# Altium PCB Pannelisation_janvier2018.PcbDoc (part 1 of 3)
Units mil, origin at the board's own origin, x right, y up, seen from the top; angles counter-clockwise.
Board outline 6785 x 5025 mil, 2 copper layers (Top Layer, Bottom Layer); 423 components, 0 nets, 1281 pads, 340 vias.
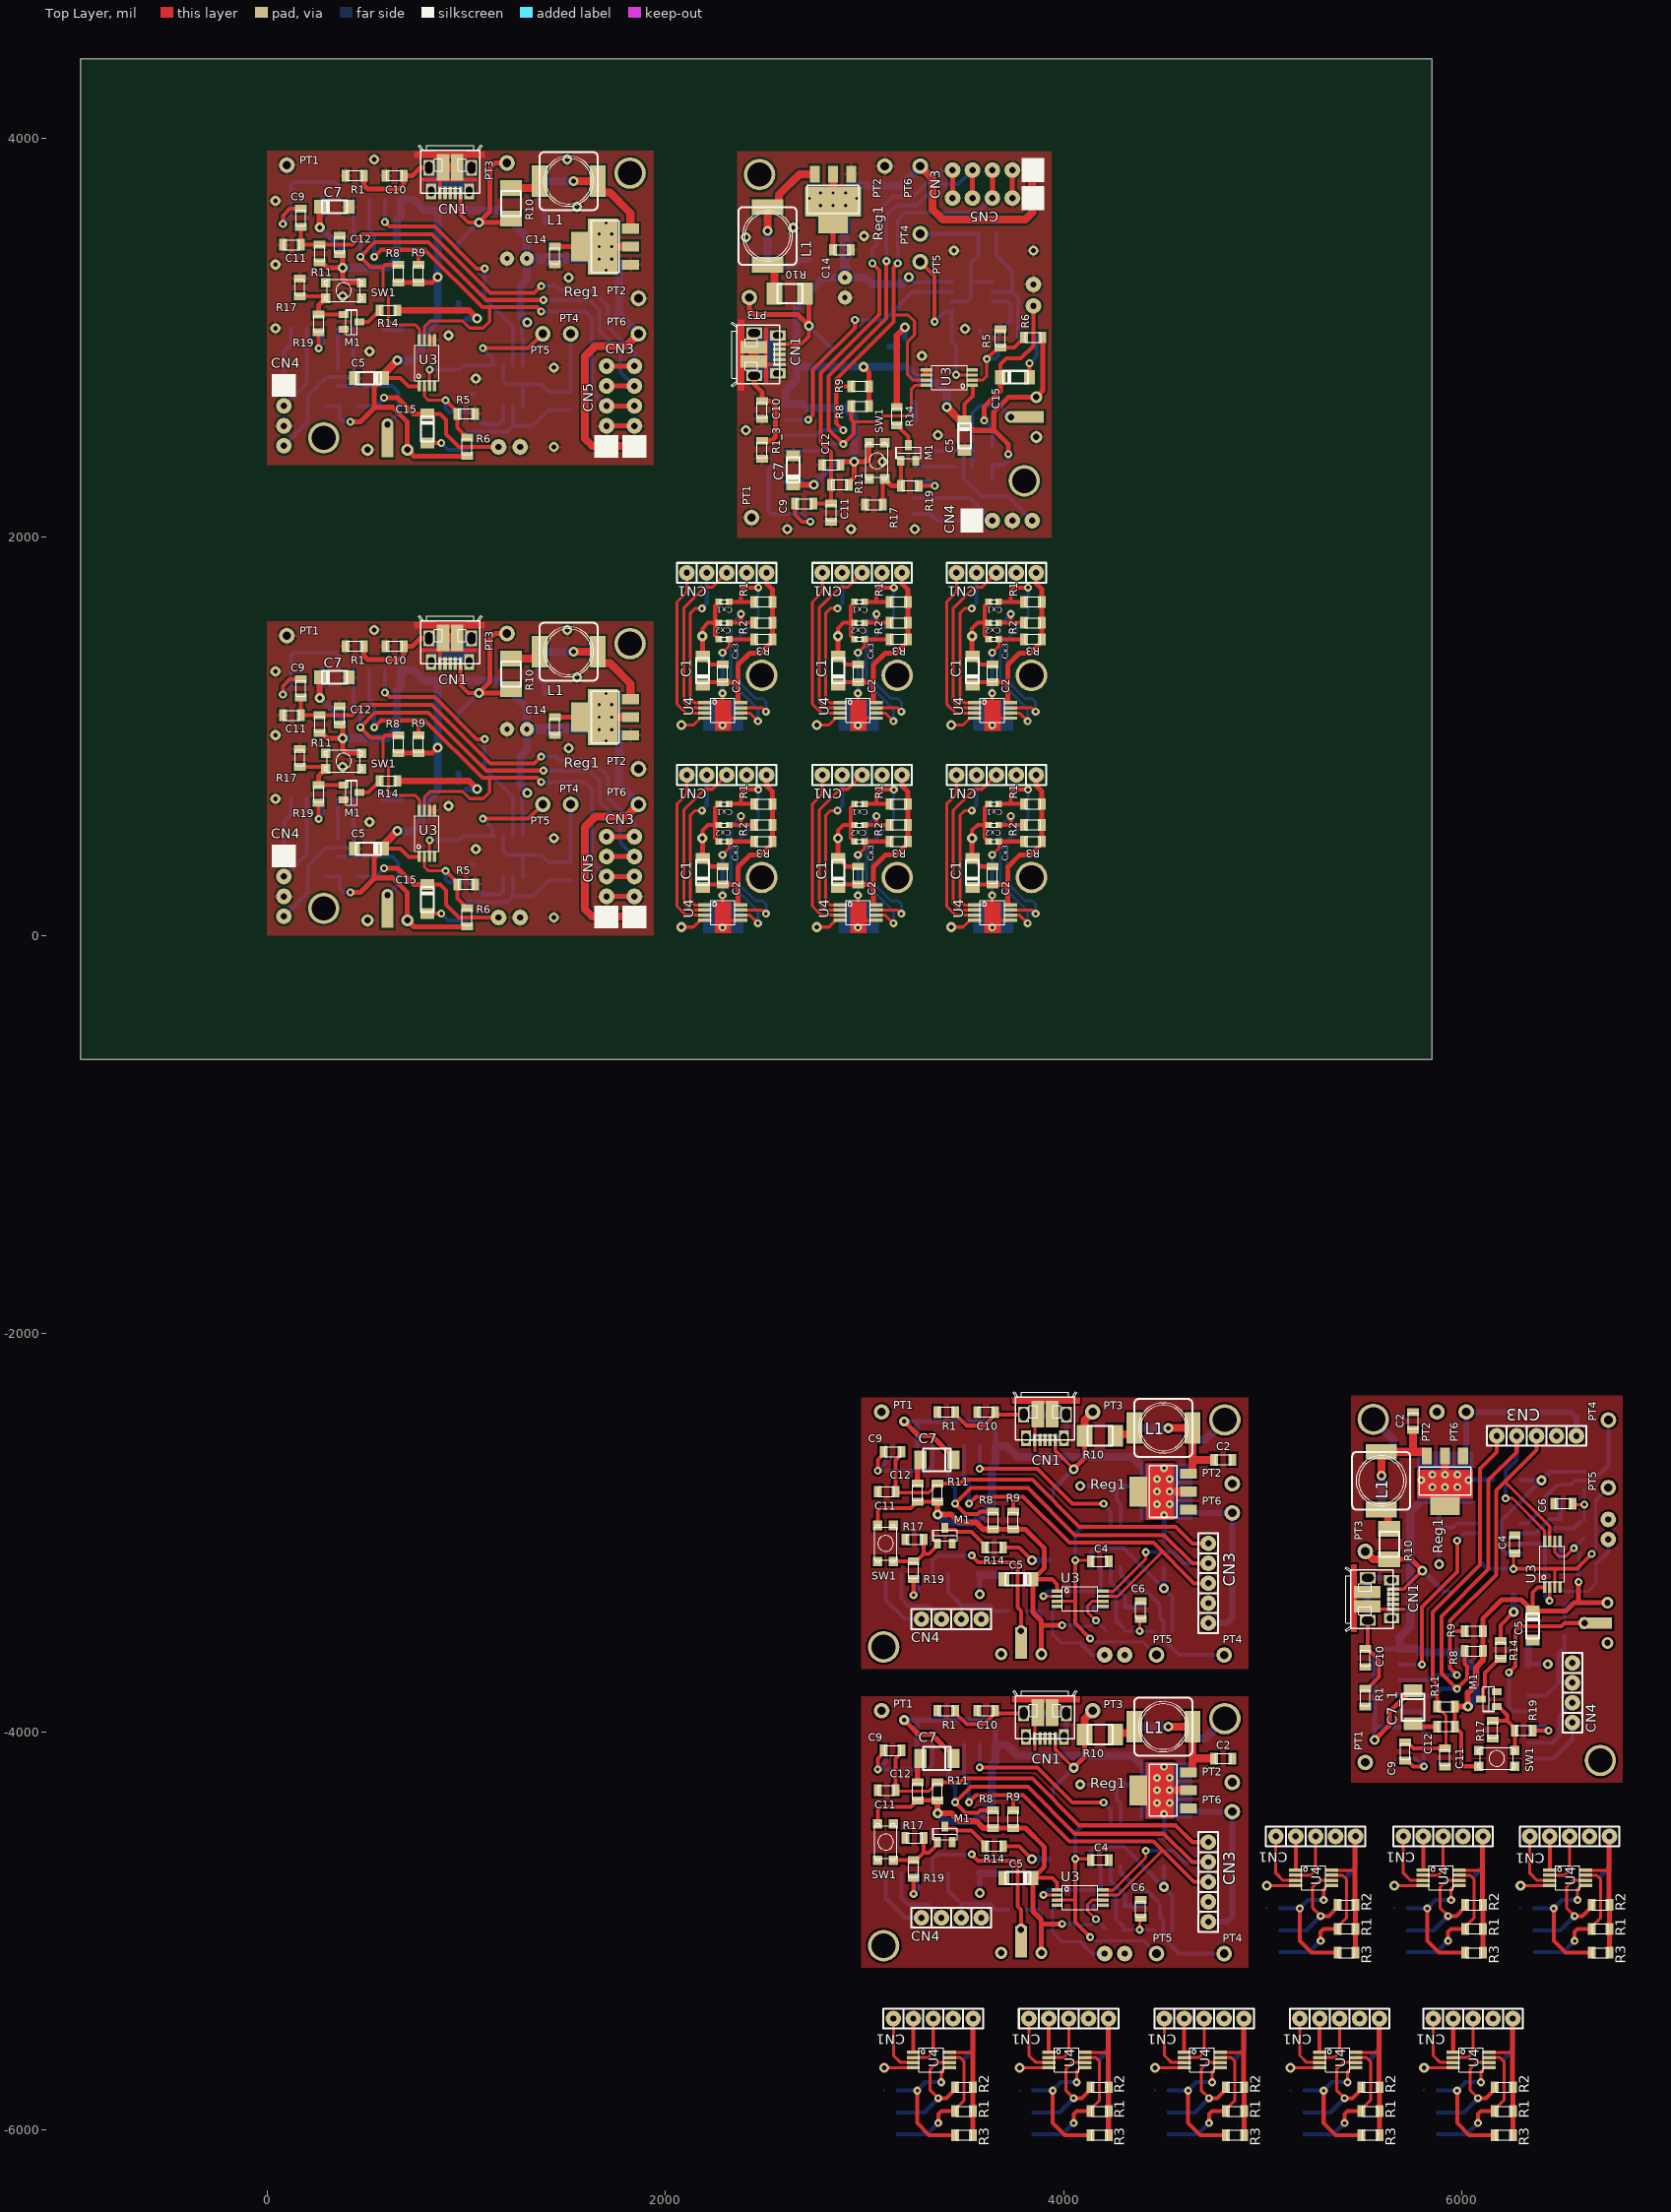
[diagram p0: Top Layer view]
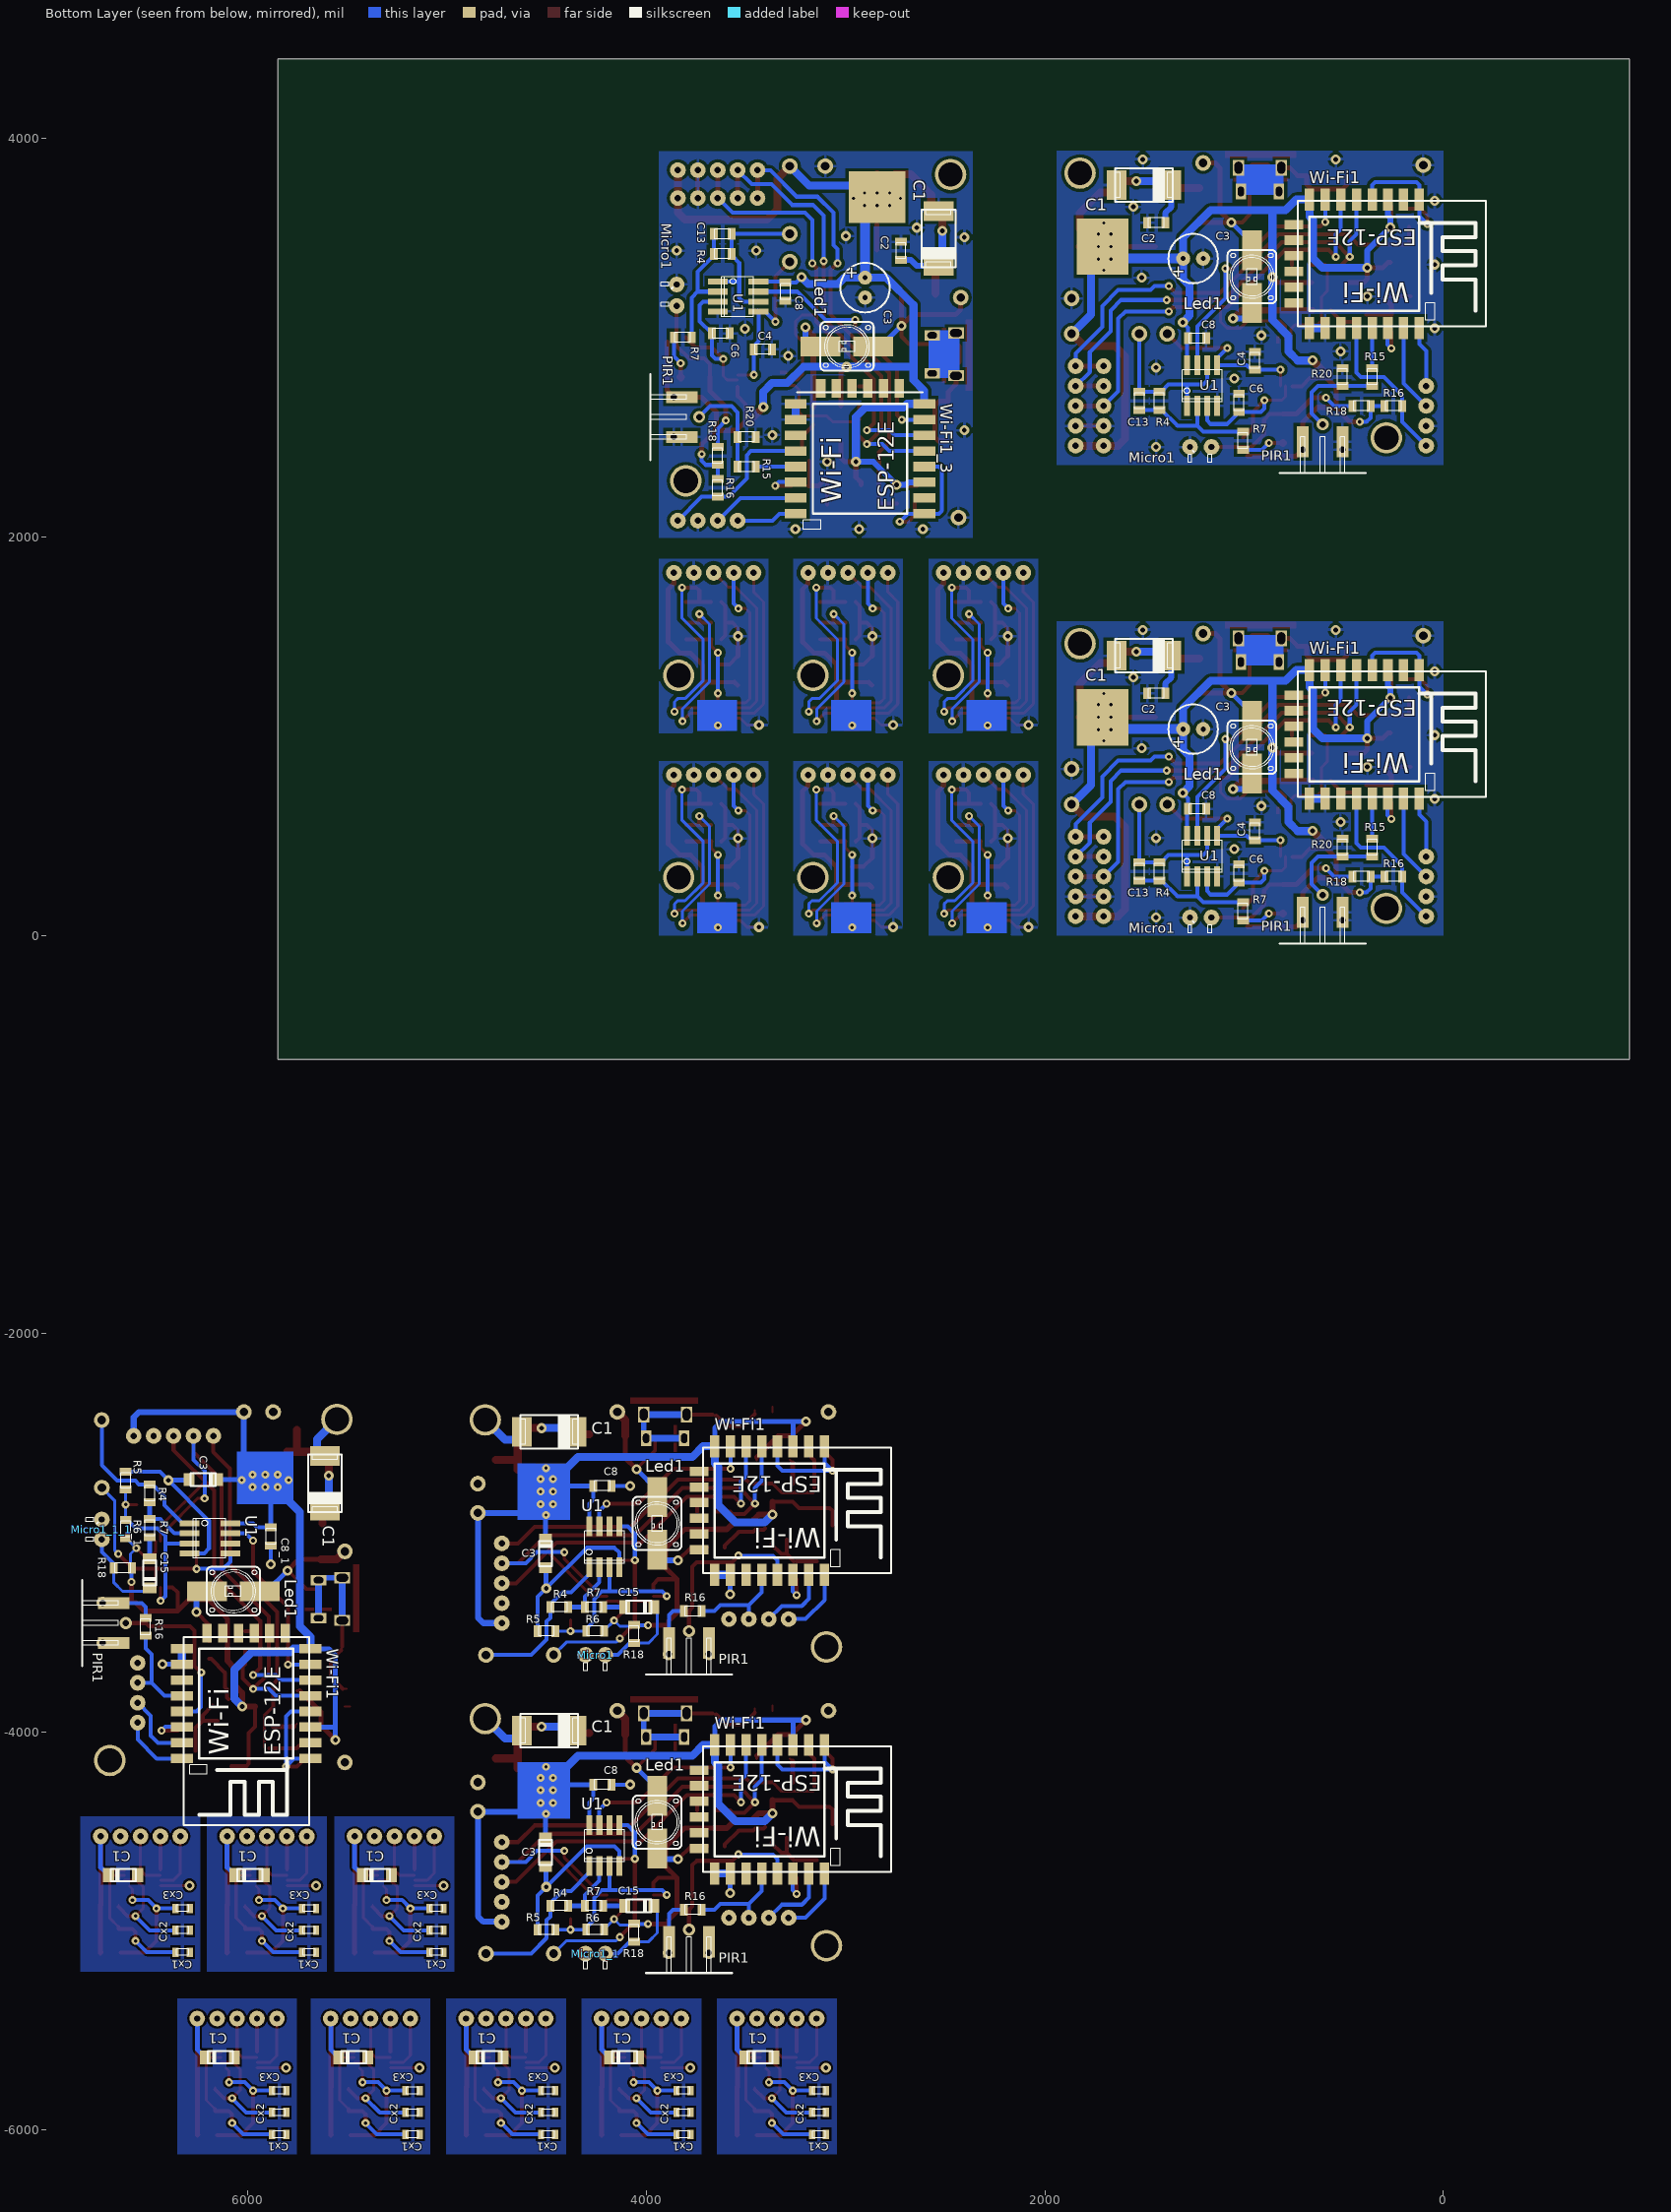
[diagram p1: Bottom Layer view, seen from below]

## Layer stack, top to bottom
Top Layer: signal copper 1.4
Dielectric: dielectric 12.6, FR-4, Dk 4.8
Bottom Layer: signal copper 1.4

## Board outline
-935,-625 5850,-625 5850,4400 -935,4400

## Design rules (kind name [scope] priority, off if disabled: settings)
Clearance [All] p1 off: gap=4
PolygonConnect [All] p1: connectstyle=Relief reliefconductorwidth=10 reliefentries=4 polygonreliefangle="90 Angle"
RoomDefinition Version_2018_01 [InComponentClass('Version_2018_01')] p1: confinementstyle=ConfineIn formatcopy=TRUE lockcomponents=FALSE outline -70,-204 4045,-204 4045,4002 -70,4002
RoomDefinition SON_versept2017 [InComponentClass('SON_versept2017')] p2: confinementstyle=ConfineIn formatcopy=TRUE lockcomponents=FALSE outline 2495,-6510 7395,-6510 7395,-1986 2495,-1986
RoutingVias [All] p1: holewidth=28 width=50 viastyle="Through Hole" minholewidth=28 minwidth=50 maxholewidth=28 maxwidth=50
ShortCircuit [All] p1 off: allowed=FALSE
SilkscreenOverComponentPads [All] p1: minsilkscreentomaskgap=10
SolderMaskExpansion [All] p1: expansion=4
UnRoutedNet [All] p1 off:
Width [All] p1: maxlimit=120 minlimit=10 preferedwidth=10
25 further rules are at their usual default settings.

## Components (designator, comment, footprint, x,y, rotation, side; value= is the part's Value field where it differs from the comment)
C1 "220µF/16V" 7343-31 4606,-2494 r180 bottom
C1 "220µF/16V" 7343-31 4606,-3994 r180 bottom
C1 "220µF/16V" 7343-31 5614,-2634 r270 bottom
C1 "1µF/16V" 3216-18 3505,-5635 r180 bottom
C1 "1µF/16V" 3216-18 4185,-5635 r180 bottom
C1 "1µF/16V" 3216-18 5545,-5635 r180 bottom
C1 "1µF/16V" 3216-18 4865,-5635 r180 bottom
C1 "1µF/16V" 3216-18 6215,-5635 r180 bottom
C1 "1µF/16V" 3216-18 6700,-4720 r180 bottom
C1 "1µF/16V" 3216-18 5425,-4720 r180 bottom
C1 "1µF/16V" 3216-18 6065,-4720 r180 bottom
C1 "220µF/16V" 7343-31 1620,3767 r180 bottom
C1 "220µF/16V" 7343-31 1620,1404 r180 bottom
C1 "220µF/16V" 7343-31 2533,3617 r270 bottom
C1 "1µF/16V" 3216-18 3542,240 r90 top
C1 "1µF/16V" 3216-18 2868,240 r90 top
C1 "1µF/16V" 3216-18 2188,240 r90 top
C1 "1µF/16V" 3216-18 2188,1255 r90 top
C1 "1µF/16V" 3216-18 2868,1255 r90 top
C1 "1µF/16V" 3216-18 3542,1255 r90 top
C2 "100n" 0805 4846,-2634 r180 top
C2 "100n" 0805 4846,-4134 r180 top
C2 "100n" 0805 5754,-2394 r270 top
C2 "100n" 0805 1485,3578 r180 bottom
C2 "100n" 0805 1485,1215 r180 bottom
C2 "100n" 0805 2722,3482 r270 bottom
C2 "47n" 0805 3642,255 r90 top
C2 "47n" 0805 2968,255 r90 top
C2 "47n" 0805 2288,255 r90 top
C2 "47n" 0805 2288,1270 r90 top
C2 "47n" 0805 2968,1270 r90 top
C2 "47n" 0805 3642,1270 r90 top
C3 "10µF/16V" "Tantale 10µF/16V" 4506,-3034 r90 bottom
C3 "10µF/16V" "Tantale 10µF/16V" 4506,-4534 r90 bottom
C3 "10µF/16V" "Tantale 10µF/16V" 6154,-2734 r180 bottom
C3 "47µF/16V" 47µF/16V 1205,3398 r0 bottom
C3 "47µF/16V" 47µF/16V 1205,1035 r0 bottom
C3 "47µF/16V" 47µF/16V 2902,3202 r90 bottom
C4 "100n" 0805 4226,-3144 r180 top
C4 "100n" 0805 4226,-4644 r180 top
C4 "100n" 0805 6264,-3014 r270 top
C4 "100n" 0805 945,2930 r270 bottom
C4 "100n" 0805 945,567 r270 bottom
C4 "100n" 0805 3370,2942 r0 bottom
C5 "10µF/6V3 tantale" "Tantale 10µF/6V3" 3846,-3234 r180 top
C5 "10µF/6V3 tantale" "Tantale 10µF/6V3" 3846,-4734 r180 top
C5 "10µF/6V3 tantale" "Tantale 10µF/6V3" 6354,-3394 r270 top
C5 "10µF/6V3 tantale" "Tantale 10µF/6V3" 585,2798 r180 top
C5 "10µF/6V3 tantale" "Tantale 10µF/6V3" 585,435 r180 top
C5 "10µF/6V3 tantale" "Tantale 10µF/6V3" 3502,2582 r270 top
C6 "10n" 0805 4386,-3434 r90 top
C6 "10n" 0805 4386,-4934 r90 top
C6 "10n" 0805 6554,-2854 r180 top
C6 "100n" 0805 1025,2628 r90 bottom
C6 "100n" 0805 1025,265 r90 bottom
C6 "100n" 0805 3672,3022 r180 bottom
C7 "47µF/10V tantale" "tantale 47µF/10V" 3446,-2634 r180 top
C7 "47µF/10V tantale" "tantale 47µF/10V" 3446,-4134 r180 top
C7 "10µF/6V3 tantale" "Tantale 10µF/6V3" 265,3658 r0 top
C7 "10µF/6V3 tantale" "Tantale 10µF/6V3" 265,1295 r0 top
C7 "10µF/6V3 tantale" "Tantale 10µF/6V3" 2642,2262 r90 top
C7_1 "47µF/10V tantale" "tantale 47µF/10V" 5754,-3794 r270 top (schematic designator C7)
C8 "100n" 0805 4176,-2765 r0 bottom
C8 "100n" 0805 4176,-4265 r0 bottom
C8 "100n" 0805 1190,2998 r0 bottom
C8 "100n" 0805 1190,635 r0 bottom
C8 "100n" 0805 3302,3187 r90 bottom
C8_1 "100n" 0805 5885,-3064 r90 bottom (schematic designator C8)
C9 "100n" 0805 3186,-2594 r180 top
C9 "100n" 0805 3186,-4094 r180 top
C9 "100n" 0805 5714,-4054 r270 top
C9 "100n" 0805 170,3558 r90 top
C9 "100n" 0805 170,1195 r90 top
C9 "100n" 0805 2742,2167 r180 top
C10 "100 n" 0805 3566,-2394 r0 top
C10 "100 n" 0805 3566,-3894 r0 top
C10 "100 n" 0805 5514,-3674 r90 top
C10 "100 n" 0805 596,3815 r0 top
C10 "100 n" 0805 596,1452 r0 top
C10 "100 n" 0805 2485,2593 r90 top
C11 "100n" 0805 3066,-2794 r0 top
C11 "100n" 0805 3066,-4294 r0 top
C11 "100n" 0805 5914,-4174 r90 top
C11 "100n" 0805 80,3467 r0 top
C11 "100n" 0805 80,1104 r0 top
C11 "100n" 0805 2833,2077 r90 top
C12 "100n" 0805 3266,-2754 r270 top
C12 "100n" 0805 3266,-4254 r270 top
C12 "100n" 0805 5874,-3974 r0 top
C12 "100n" 0805 365,3512 r270 top
C12 "100n" 0805 365,1149 r270 top
C12 "100n" 0805 2788,2362 r0 top
C13 "120p" 0805 1525,2638 r90 bottom
C13 "120p" 0805 1525,275 r90 bottom
C13 "120p" 0805 3662,3522 r180 bottom
C14 "220n" 0805 1445,3368 r90 top
C14 "220n" 0805 1445,1005 r90 top
C14 "220n" 0805 2932,3442 r180 top
C15 "1µF/16V" 3216-18 3962.68,-3373.68 r0 bottom
C15 "1µF/16V" 3216-18 3962.68,-4873.68 r0 bottom
C15 "1µF/16V" 3216-18 6493.68,-3277.32 r90 bottom
C15 "1µF/16V" 3216-18 805,2618 r270 top
C15 "1µF/16V" 3216-18 805,255 r270 top
C15 "1µF/16V" 3216-18 3682,2802 r0 top
CN1 "USB Micro B" "USB Micro 714-2347" 3906,-2534 r180 top
CN1 "USB Micro B" "USB Micro 714-2347" 3906,-4034 r180 top
CN1 "USB Micro B" "USB Micro 714-2347" 5654,-3334 r270 top
CN1 "inch_ligne 1x5" INCH_1x5_droit 3545,-5440 r180 top
CN1 "inch_ligne 1x5" INCH_1x5_droit 4225,-5440 r180 top
CN1 "inch_ligne 1x5" INCH_1x5_droit 5585,-5440 r180 top
CN1 "inch_ligne 1x5" INCH_1x5_droit 4905,-5440 r180 top
CN1 "inch_ligne 1x5" INCH_1x5_droit 6255,-5440 r180 top
CN1 "inch_ligne 1x5" INCH_1x5_droit 6740,-4525 r180 top
CN1 "inch_ligne 1x5" INCH_1x5_droit 5465,-4525 r180 top
CN1 "inch_ligne 1x5" INCH_1x5_droit 6105,-4525 r180 top
CN1 "USB Micro B" "USB Micro 714-2347" 920,3727 r180 top
CN1 "USB Micro B" "USB Micro 714-2347" 920,1364 r180 top
CN1 "USB Micro B" "USB Micro 714-2347" 2573,2917 r270 top
CN1 "inch_ligne 1x5" INCH_1x5_droit 3862,805 r180 top
CN1 "inch_ligne 1x5" INCH_1x5_droit 3188,805 r180 top
CN1 "inch_ligne 1x5" INCH_1x5_droit 2508,805 r180 top
CN1 "inch_ligne 1x5" INCH_1x5_droit 2508,1820 r180 top
CN1 "inch_ligne 1x5" INCH_1x5_droit 3188,1820 r180 top
CN1 "inch_ligne 1x5" INCH_1x5_droit 3862,1820 r180 top
CN3 "inch_ligne 1x5" INCH_1x5_droit 4726,-3454 r90 top
CN3 "inch_ligne 1x5" INCH_1x5_droit 4726,-4954 r90 top
CN3 "inch_ligne 1x5" INCH_1x5_droit 6574,-2514 r180 top
CN3 "inch_ligne 1x5" INCH_1x5_ver2_droit 1845,2458 r90 top
CN3 "inch_ligne 1x5" INCH_1x5_ver2_droit 1845,95 r90 top
CN3 "inch_ligne 1x5" INCH_1x5_ver2_droit 3842,3842 r180 top
CN4 "inch_ligne 1x4" INCH_1x4_droit 3286,-3434 r0 top
CN4 "inch_ligne 1x4" INCH_1x4_droit 3286,-4934 r0 top
CN4 "inch_ligne 1x4" INCH_1x4_droit 6554,-3954 r90 top
CN4 "inch_ligne 1x4" INCH_1x4_ver2_droit 85,2758 r270 top
CN4 "inch_ligne 1x4" INCH_1x4_ver2_droit 85,395 r270 top
CN4 "inch_ligne 1x4" INCH_1x4_ver2_droit 3542,2082 r0 top
CN5 "inch_ligne 1x5" INCH_1x5_ver2_droit 1705,2458 r90 top
CN5 "inch_ligne 1x5" INCH_1x5_ver2_droit 1705,95 r90 top
CN5 "inch_ligne 1x5" INCH_1x5_ver2_droit 3842,3702 r180 top
Cx1 "PONT" 0603 3165,-6005 r180 bottom
Cx1 "PONT" 0603 3845,-6005 r180 bottom
Cx1 "PONT" 0603 5205,-6005 r180 bottom
Cx1 "PONT" 0603 4525,-6005 r180 bottom
Cx1 "PONT" 0603 5875,-6005 r180 bottom
Cx1 "PONT" 0603 6360,-5090 r180 bottom
Cx1 "PONT" 0603 5085,-5090 r180 bottom
Cx1 "PONT" 0603 5725,-5090 r180 bottom
Cx1 "PONT" 0402 3674,659 r180 top
Cx1 "PONT" 0402 3000,659 r180 top
Cx1 "PONT" 0402 2320,659 r180 top
Cx1 "PONT" 0402 2320,1674 r180 top
Cx1 "PONT" 0402 3000,1674 r180 top
Cx1 "PONT" 0402 3674,1674 r180 top
Cx2 "PONT" 0603 3165,-5895 r180 bottom
Cx2 "PONT" 0603 3845,-5895 r180 bottom
Cx2 "PONT" 0603 5205,-5895 r180 bottom
Cx2 "PONT" 0603 4525,-5895 r180 bottom
Cx2 "PONT" 0603 5875,-5895 r180 bottom
Cx2 "PONT" 0603 6360,-4980 r180 bottom
Cx2 "PONT" 0603 5085,-4980 r180 bottom
Cx2 "PONT" 0603 5725,-4980 r180 bottom
Cx2 "PONT" 0402 3674,553.73 r180 top
Cx2 "PONT" 0402 3000,553.73 r180 top
Cx2 "PONT" 0402 2320,553.73 r180 top
Cx2 "PONT" 0402 2320,1568.73 r180 top
Cx2 "PONT" 0402 3000,1568.73 r180 top
Cx2 "PONT" 0402 3674,1568.73 r180 top
Cx3 "PONT" 0603 3165,-5785 r180 bottom
Cx3 "PONT" 0603 3845,-5785 r180 bottom
Cx3 "PONT" 0603 5205,-5785 r180 bottom
Cx3 "PONT" 0603 4525,-5785 r180 bottom
Cx3 "PONT" 0603 5875,-5785 r180 bottom
Cx3 "PONT" 0603 6360,-4870 r180 bottom
Cx3 "PONT" 0603 5085,-4870 r180 bottom
Cx3 "PONT" 0603 5725,-4870 r180 bottom
Cx3 "PONT" 0402 3674,471 r180 top
Cx3 "PONT" 0402 3000,471 r180 top
Cx3 "PONT" 0402 2320,471 r180 top
Cx3 "PONT" 0402 2320,1486 r180 top
Cx3 "PONT" 0402 3000,1486 r180 top
Cx3 "PONT" 0402 3674,1486 r180 top
L1 "100µH CD74R series" "SELF CD74R" 4646,-2474 r0 top
L1 "100µH CD74R series" "SELF CD74R" 4646,-3974 r0 top
L1 "100µH CD74R series" "SELF CD74R" 5594,-2594 r90 top
L1 "100µH CD74R series" "SELF CD74R" 1660,3787 r0 top
L1 "100µH CD74R series" "SELF CD74R" 1660,1424 r0 top
L1 "100µH CD74R series" "SELF CD74R" 2513,3657 r90 top
Led1 "LTW5AM" LTW5AM 3946,-2954 r270 bottom
Led1 "LTW5AM" LTW5AM 3946,-4454 r270 bottom
Led1 "LTW5AM" LTW5AM 6074,-3294 r0 bottom
Led1 "LTW5AM" LTW5AM 960,3307 r270 bottom
Led1 "LTW5AM" LTW5AM 960,944 r270 bottom
Led1 "LTW5AM" LTW5AM 2993,2957 r0 bottom
M1 "NTR4501N" "SOT23 (NTR4501)" 3366,-3054 r0 top
M1 "NTR4501N" "SOT23 (NTR4501)" 3366,-4554 r0 top
M1 "NTR4501N" "SOT23 (NTR4501)" 6174,-3874 r90 top
M1 "NTR4501N" "SOT23 (NTR4501)" 385,3118 r270 top
M1 "NTR4501N" "SOT23 (NTR4501)" 385,755 r270 top
M1 "NTR4501N" "SOT23 (NTR4501)" 3182,2382 r0 top
Micro1 "Electret" "Micro_electret simple"#1 4206,-3614 r180 bottom
Micro1 "Electret" "Micro_electret simple"#2 1171,2452 r180 bottom
Micro1 "Electret" "Micro_electret simple"#2 1171,89 r180 bottom
Micro1 "Electret" "Micro_electret simple"#2 3848,3168 r270 bottom
Micro1_1 "Electret" "Micro_electret simple"#1 4206,-5114 r180 bottom (schematic designator Micro1)
Micro1_1_1 "Electret" "Micro_electret simple"#1 6734,-3034 r270 bottom (schematic designator Micro1)
PIR1 "PIR_WL" PIR_WL_footprint 3886,-3554 r180 bottom
PIR1 "PIR_WL" PIR_WL_footprint 3886,-5054 r180 bottom
PIR1 "PIR_WL" PIR_WL_footprint 6674,-3354 r270 bottom
PIR1 "PIR_WL" PIR_WL 705,2478 r180 bottom
PIR1 "PIR_WL" PIR_WL 3822,2702 r270 bottom
PIR1 "PIR_WL" PIR_WL 705,115 r180 bottom
PT1 "GND" "PTEST boucle"#1 3086,-2394 r0 top
PT1 "GND" "PTEST boucle"#1 3086,-3894 r0 top
PT1 "GND" "PTEST boucle"#1 5514,-4154 r90 top
PT1 "GND" "PTEST boucle"#1 100,3867 r0 top
PT1 "GND" "PTEST boucle"#1 100,1504 r0 top
PT1 "GND" "PTEST boucle"#1 2433,2097 r90 top
PT2 "GND" "PTEST boucle"#1 4846,-2754 r0 top
PT2 "GND" "PTEST boucle"#1 4846,-4254 r0 top
PT2 "GND" "PTEST boucle"#1 5874,-2394 r90 top
PT2 "GND" "PTEST boucle"#1 1865,3198 r0 top
PT2 "GND" "PTEST boucle"#1 1865,835 r0 top
PT2 "GND" "PTEST boucle"#1 3102,3862 r90 top
PT3 "+5V" "PTEST boucle"#1 4146,-2394 r0 top
PT3 "+5V" "PTEST boucle"#1 4146,-3894 r0 top
PT3 "+5V" "PTEST boucle"#1 5514,-3094 r90 top
PT3 "+5V" "PTEST boucle"#1 1205,3878 r0 top
PT3 "+5V" "PTEST boucle"#1 1205,1515 r0 top
PT3 "+5V" "PTEST boucle"#1 2422,3202 r90 top
PT4 "Son" "PTEST boucle"#2 4806,-3614 r0 top
PT4 "Son" "PTEST boucle"#2 4806,-5114 r0 top
PT4 "Son" "PTEST boucle"#2 6734,-2434 r90 top
PT4 "Son" "PTEST boucle"#3 1525,3018 r0 top
PT4 "Son" "PTEST boucle"#3 1525,655 r0 top
PT4 "Son" "PTEST boucle"#3 3282,3522 r90 top
PT5 "Seuil" "PTEST boucle"#1 4466,-3614 r0 top
PT5 "Seuil" "PTEST boucle"#1 4466,-5114 r0 top
PT5 "Seuil" "PTEST boucle"#1 6734,-2774 r90 top
PT5 "Seuil" "PTEST boucle"#3 1385,3018 r0 top
PT5 "Seuil" "PTEST boucle"#3 1385,655 r0 top
PT5 "Seuil" "PTEST boucle"#3 3282,3382 r90 top
PT6 "+3V3" "PTEST boucle"#4 4846,-2894 r0 top
PT6 "+3V3" "PTEST boucle"#4 4846,-4394 r0 top
PT6 "+3V3" "PTEST boucle"#4 6014,-2394 r90 top
PT6 "+3V3" "PTEST boucle"#5 1865,3038 r0 top
PT6 "+3V3" "PTEST boucle"#5 1865,675 r0 top
PT6 "+3V3" "PTEST boucle"#5 3262,3862 r90 top
R1 "100K" 0805 3366,-2394 r0 top
R1 "100K" 0805 3366,-3894 r0 top
R1 "100K" 0805 5514,-3874 r90 top
R1 "10K" 0805 3455,-5905 r0 top
R1 "10K" 0805 4135,-5905 r0 top
R1 "10K" 0805 5495,-5905 r0 top
R1 "10K" 0805 4815,-5905 r0 top
R1 "10K" 0805 6165,-5905 r0 top
R1 "10K" 0805 6650,-4990 r0 top
R1 "10K" 0805 5375,-4990 r0 top
R1 "10K" 0805 6015,-4990 r0 top
R1 "100K" 0805 396,3815 r0 top
R1 "100K" 0805 396,1452 r0 top
R1 "10K" 0805 3801,659 r0 top
R1 "10K" 0805 3127,659 r0 top
R1 "10K" 0805 2447,659 r0 top
R1 "10K" 0805 2447,1674 r0 top
R1 "10K" 0805 3127,1674 r0 top
R1 "10K" 0805 3801,1674 r0 top
R1_3 "100K" 0805 2485,2393 r90 top (schematic designator R1)
R2 "10K" 0805 3455,-5785 r0 top
R2 "10K" 0805 4135,-5785 r0 top
R2 "10K" 0805 5495,-5785 r0 top
R2 "10K" 0805 4815,-5785 r0 top
R2 "10K" 0805 6165,-5785 r0 top
R2 "10K" 0805 6650,-4870 r0 top
R2 "10K" 0805 5375,-4870 r0 top
R2 "10K" 0805 6015,-4870 r0 top
R2 "10K" 0805 3801,554 r0 top
R2 "10K" 0805 3127,554 r0 top
R2 "10K" 0805 2447,554 r0 top
R2 "10K" 0805 2447,1569 r0 top
R2 "10K" 0805 3127,1569 r0 top
R2 "10K" 0805 3801,1569 r0 top
R3 "10K" 0805 3455,-6025 r0 top
R3 "10K" 0805 4135,-6025 r0 top
R3 "10K" 0805 5495,-6025 r0 top
R3 "10K" 0805 4815,-6025 r0 top
R3 "10K" 0805 6165,-6025 r0 top
R3 "10K" 0805 6650,-5110 r0 top
R3 "10K" 0805 5375,-5110 r0 top
R3 "10K" 0805 6015,-5110 r0 top
R3 "10K" 0805 3801,471 r0 top
R3 "10K" 0805 3127,471 r0 top
R3 "10K" 0805 2447,471 r0 top
R3 "10K" 0805 2447,1486 r0 top
R3 "10K" 0805 3127,1486 r0 top
R3 "10K" 0805 3801,1486 r0 top
R4 "100K" 0805 4392.68,-3373.68 r0 bottom
R4 "100K" 0805 4392.68,-4873.68 r0 bottom
R4 "100K" 0805 6493.68,-2847.32 r90 bottom
R4 "100K" 0805 1425,2638 r90 bottom
R4 "100K" 0805 1425,275 r90 bottom
R4 "100K" 0805 3662,3422 r180 bottom
R5 "10K" 0805 4546,-3494 r180 bottom
R5 "10K" 0805 4546,-4994 r180 bottom
R5 "10K" 0805 6614,-2694 r270 bottom
R5 "10K" 0805 1045,2618 r180 top
R5 "10K" 0805 1045,255 r180 top
R5 "10K" 0805 3682,3042 r270 top
R6 "10K" 0805 4302.68,-3493.68 r180 bottom
R6 "10K" 0805 4302.68,-4993.68 r180 bottom
R6 "10K" 0805 1005,2498 r270 top
R6 "10K" 0805 1005,135 r270 top
R6 "10K" 0805 3802,3002 r0 top
R6_1 "10K" 0805 6613.68,-2937.32 r270 bottom (schematic designator R6)
R7 "1K" 0805 4217.68,-3373.68 r0 bottom
R7 "1K" 0805 4217.68,-4873.68 r0 bottom
R7 "1K" 0805 6493.68,-3022.32 r90 bottom
R7 "1K" 0805 1005,2438 r90 bottom
R7 "1K" 0805 1005,75 r90 bottom
R7 "1K" 0805 3862,3002 r180 bottom
R8 "10K" 0805 3646,-2894 r270 top
R8 "10K" 0805 3646,-4394 r270 top
R8 "10K" 0805 6014,-3594 r0 top
R8 "10K" 0805 660,3367 r270 top
R8 "10K" 0805 660,1004 r270 top
R8 "10K" 0805 2933,2657 r0 top
R9 "10K" 0805 3746,-2894 r270 top
R9 "10K" 0805 3746,-4394 r270 top
R9 "10K" 0805 6014,-3494 r0 top
R9 "10K" 0805 760,3367 r270 top
R9 "10K" 0805 760,1004 r270 top
R9 "10K" 0805 2933,2757 r0 top
R10 "0R33" 1210 4106,-2514 r0 top
R10 "0R33" 1210 4106,-4014 r0 top
R10 "0R33" 1210 5634,-3134 r90 top
R10 "0R33" 1210 1225,3598 r90 top
R10 "0R33" 1210 1225,1235 r90 top
R10 "0R33" 1210 2702,3222 r180 top
R11 "4K7" 0805 3366,-2754 r270 top
R11 "4K7" 0805 3366,-4254 r270 top
R11 "4K7" 0805 5874,-3874 r0 top
R11 "4K7" 0805 265,3468 r270 top
R11 "4K7" 0805 265,1105 r270 top
R11 "4K7" 0805 2832,2262 r0 top
R14 "68" 0805 3606,-3074 r0 top
R14 "68" 0805 3606,-4574 r0 top
R14 "68" 0805 6194,-3634 r90 top
R14 "68" 0805 565,3138 r0 top
R14 "68" 0805 565,775 r0 top
R14 "68" 0805 3162,2562 r90 top
R15 "330" 0805 356,2848 r270 bottom
R15 "330" 0805 356,485 r270 bottom
R15 "330" 0805 3452,2353 r0 bottom
R16 "10K" 0805 3722.68,-3393.68 r0 bottom
R16 "10K" 0805 3722.68,-4893.68 r0 bottom
R16 "10K" 0805 6513.68,-3517.32 r90 bottom
R16 "10K" 0805 205,2658 r0 bottom
R16 "10K" 0805 205,295 r0 bottom
R16 "10K" 0805 3642,2202 r90 bottom
R17 "15K" 0805 3206,-3034 r0 top
R17 "15K" 0805 3206,-4534 r0 top
R17 "15K" 0805 6154,-4034 r90 top
R17 "15K" 0805 165,3298 r270 top
R17 "15K" 0805 165,935 r270 top
R17 "15K" 0805 3002,2162 r0 top
R18 "2K" 0805 4062.68,-3553.68 r90 bottom
R18 "2K" 0805 4062.68,-5053.68 r90 bottom
R18 "2K" 0805 6673.68,-3177.32 r180 bottom
R18 "2K" 0805 455,2658 r180 bottom
R18 "2K" 0805 455,295 r180 bottom
R18 "2K" 0805 3642,2452 r270 bottom
R19 "470" 0805 3246,-3234 r90 top
R19 "470" 0805 3246,-4734 r90 top
R19 "470" 0805 6354,-3994 r180 top
R19 "470" 0805 260,3027 r90 top
R19 "470" 0805 260,664 r90 top
R19 "470" 0805 3273,2257 r180 top
R20 "15K" 0805 505,2848 r270 bottom
R20 "15K" 0805 505,485 r270 bottom
R20 "15K" 0805 3452,2502 r0 bottom
Reg1 "LM1117/33" "SOT-223 thermo1"#1 4626,-2794 r90 top
Reg1 "LM1117/33" "SOT-223 thermo1"#1 4626,-4294 r90 top
Reg1 "LM1117/33" "SOT-223 thermo1"#1 5914,-2614 r180 top
Reg1 "LM1117/33" "SOT-223 thermo1"#2 1825,3458 r90 top
Reg1 "LM1117/33" "SOT-223 thermo1"#2 1825,1095 r90 top
Reg1 "LM1117/33" "SOT-223 thermo1"#2 2842,3822 r180 top
SW1 "KMR 4" "µSwitch KMR4" 3106,-3054 r90 top
SW1 "KMR 4" "µSwitch KMR4" 3106,-4554 r90 top
SW1 "KMR 4" "µSwitch KMR4" 6174,-4134 r180 top
SW1 "KMR 4" "µSwitch KMR4" 385,3238 r0 top
SW1 "KMR 4" "µSwitch KMR4" 385,875 r0 top
SW1 "KMR 4" "µSwitch KMR4" 3062,2382 r90 top
U1 "AD8052" SOIC08 4286,-3174 r90 bottom
U1 "AD8052" SOIC08 4286,-4674 r90 bottom
U1 "AD8052" SOIC08 6294,-2954 r180 bottom
U1 "AD8052" SOIC08 1285,2658 r90 bottom
U1 "AD8052" SOIC08 1285,295 r90 bottom
U1 "AD8052" SOIC08 3642,3282 r180 bottom
U3 "MCP47FEB21" TSSOP_8 3966,-3294 r0 top
U3 "MCP47FEB21" TSSOP_8 3966,-4794 r0 top
U3 "MCP47FEB21" TSSOP_8 6414,-3274 r90 top
U3 "MCP47FEB21" TSSOP_8 765,2758 r90 top
U3 "MCP47FEB21" TSSOP_8 765,395 r90 top
U3 "MCP47FEB21" TSSOP_8 3542,2762 r180 top
U4 "MCP9808" MSOP-08 3245,-5610 r0 top
U4 "MCP9808" MSOP-08 3925,-5610 r0 top
U4 "MCP9808" MSOP-08 5285,-5610 r0 top
U4 "MCP9808" MSOP-08 4605,-5610 r0 top
U4 "MCP9808" MSOP-08 5955,-5610 r0 top
U4 "MCP9808" MSOP-08 6440,-4695 r0 top
U4 "MCP9808" MSOP-08 5165,-4695 r0 top
U4 "MCP9808" MSOP-08 5805,-4695 r0 top
U4 "MCP9808" MSOP-08 3552,152 r0 top
U4 "MCP9808" MSOP-08 2878,152 r0 top
U4 "MCP9808" MSOP-08 2198,152 r0 top
U4 "MCP9808" MSOP-08 2198,1167 r0 top
U4 "MCP9808" MSOP-08 2878,1167 r0 top
U4 "MCP9808" MSOP-08 3552,1167 r0 top
Wi-Fi1 "ESP-12E" ESP-12E 3106,-2574 r270 bottom
Wi-Fi1 "ESP-12E" ESP-12E 3106,-4074 r270 bottom
Wi-Fi1 "ESP-12E" ESP-12E 5694,-4134 r0 bottom
Wi-Fi1 "ESP-12E" ESP-12E 120,3687 r270 bottom
Wi-Fi1 "ESP-12E" ESP-12E 120,1324 r270 bottom
Wi-Fi1_3 "ESP-12E" ESP-12E 2613,2117 r0 bottom (schematic designator Wi-Fi1)

## Footprints (in the part's own frame and the unit in brackets; to place one, negate y for a bottom-side part, rotate by r counter-clockwise, add the part's x,y. Pads: shape width x height; smd on the part's side, far side on the other; paste and mask are expansions set on the pad)
47µF/16V [mm]
  round 1.8 hole 0.65: 1(2.54,0) 2(0,0)
  silkscreen extent -1.88,-3.15 4.42,3.15
0402 [mm]
  rect 0.838x0.8 smd: 1(0,0) 2(1.3,0)
  silkscreen extent 0.15,-0.25 1.15,0.25
0603 [mm] "résistance CMS"
  rect 0.8x1.2 smd: 1(-0.1,-0.425) 2(1.7,-0.425)
  silkscreen extent 0,-0.85 1.6,0
0805 [mm] "résistance CMS"
  rect 1x1.5 smd: 1(0,0) 2(2.286,0)
  silkscreen extent 0.13,-0.63 2.13,0.63
1210 [mm] "résistance CMS 0,5W ERJ14B"
  rect 2x2.8 smd: 1(0,0) 2(3.9,0)
  silkscreen extent 0.33,-1.26 3.53,1.24
3216-18 [mm] "condensateur tantale CMS (3,2 x 1,6 x 1,6)"
  rect 1.4x1.8 smd: 1(0,0) 2(3.7,0)
  silkscreen extent 0.3,-0.79 3.5,0.81
7343-31 [mm] "condensateur tantale CMS (7,3 x 4,3 x 3,0)"
  rect 2.5x3.8 smd: 1(6.5,0) 2(-0.5,0)
  silkscreen extent -0.65,-2.15 6.65,2.15
ESP-12E [mm] "module Wi-Fi"
  rect 2.8x1.2 smd: 1(-0.2,0) 2(-0.2,-2) 3(-0.2,-4) 4(-0.2,-6) 5(-0.2,-8) 6(-0.2,-10) 7(-0.2,-12) 8(-0.2,-14) 15(16.2,-14) 16(16.2,-12) 17(16.2,-10) 18(16.2,-8) 19(16.2,-6) 20(16.2,-4) 21(16.2,-2) 22(16.2,0)
  rect 1.2x2.4 smd: 9(3,-16) 10(5,-16) 11(7,-16) 12(9,-16) 13(11,-16) 14(13,-16)
  silkscreen extent 0,-15.5 16,8.5
INCH_1x4_droit [mm] "simple rangée 2,54 mm"
  round 2 hole 0.8: 1(0,0) 2(2.54,0) 3(5.08,0) 4(7.62,0)
  silkscreen extent -1.27,-1.27 8.89,1.27
INCH_1x4_ver2_droit [mm] "simple rangée 2,54 mm"
  round 2 hole 0.8: 1(0,0) 2(2.54,0) 3(5.08,0) 4(7.62,0)
  silkscreen extent -1.52,-1.55 1.35,1.52
INCH_1x5_droit [mm] "simple rangée 2,54 mm"
  round 2 hole 0.8: 1(0,0) 2(2.54,0) 3(5.08,0) 4(7.62,0) 5(10.16,0)
  silkscreen extent -1.27,-1.27 11.43,1.27
INCH_1x5_ver2_droit [mm] "simple rangée 2,54 mm"
  round 2 hole 0.8: 1(0,0) 2(2.54,0) 3(5.08,0) 4(7.62,0) 5(10.16,0)
  silkscreen extent -1.52,-1.52 1.35,1.55
LTW5AM [mil] "LED golden dragon"
  rect 200x100 smd: 1(-132,0) 2(132,0)
  silkscreen extent -134,-122 134,122
"Micro_electret simple"#1 [mm] "Microphone coudé sur PCB sans sérigraphie"
  round 2 hole 0.8: 0(-2.54,0) 1(0,0)
  silkscreen extent -2.79,-2 0.25,-0.51
"Micro_electret simple"#2 [mm] "Microphone coudé sur PCB sans sérigraphie"
  round 2 hole 0.8: 0(-2.54,0) 1(0.203,0)
  silkscreen extent -2.79,-2 0.25,-0.51
MSOP-08 [mil] "boîtier DGK"
  rect 66x17 smd: 1(0,0) 2(0,-25.59) 3(0,-51.18) 4(0,-76.77) 5(181.1,-76.77) 6(181.1,-51.18) 7(181.1,-25.59) 8(181.1,0)
  silkscreen extent 29,-99 151,23
PIR_WL [mm] "détecteur infrarouge"
  rect 1.5x4 smd: 1(0,0) 3(5.08,0)
  rect 1.5x4 smd far side: 2(2.54,0)
  silkscreen extent -2.96,-4 8.04,0.6
PIR_WL_footprint [mm] "empreintes seules"
  rect 1.5x4 smd: 1(0,0) 3(5.08,0)
  rect 1.5x4 smd far side: 2(2.54,0)
  silkscreen extent -2.96,-4 8.04,0.6
"PTEST boucle"#1 [mm] "RS 262-2179"
  round 2 hole 1.1: 1(0,0)
"PTEST boucle"#2 [mm] "RS 262-2179"
  round 2 hole 1.1: 1(-0.017,-0.008)
"PTEST boucle"#3 [mm] "RS 262-2179"
  round 2 hole 1.1: 1(0,0.051)
"PTEST boucle"#4 [mm] "RS 262-2179"
  round 2 hole 1.1: 1(0,-0.178)
"PTEST boucle"#5 [mm] "RS 262-2179"
  round 2 hole 1.1: 1(0,-0.457)
"SELF CD74R" [mm] "Self 7,4 x 7,4"
  rect 2x4 smd: 1(0,0) 2(-7.4,0)
  silkscreen extent -7.4,-3.7 0,3.7
SOIC08 [mil]
  rect 100x30 smd: 1(0,0) 2(0,-50) 3(0,-100) 4(0,-150) 5(205,-150) 6(205,-100) 7(205,-50) 8(205,0)
  silkscreen extent 20,-175 181,25
"SOT23 (NTR4501)" [mil] "D->1 G->2 S->3"
  rect 35x50 smd: 1(37.4,78.74) 2(0,0) 3(74.8,0)
  silkscreen extent -25,12 100,68
"SOT-223 thermo1"#1 [mm] "empreinte pour SOT-223"
  rect 1.27x2.15 smd: 1(-2.3,0) 2(0,0) 3(2.3,0)
  rect 3.81x2.286 smd: 2(0,6.4)
  Top Layer region: -3.6,1.8 3.6,1.8 3.6,5.461 -3.6,5.461
  Bottom Layer region: -3.602,-0.531 3.598,-0.531 3.598,6.175 -3.602,6.175
  silkscreen extent -3.3,1.45 3.3,5
"SOT-223 thermo1"#2 [mm] "empreinte pour SOT-223"
  rect 1.27x2.15 smd: 1(-2.3,0) 2(0,0) 3(2.3,0)
  rect 3.81x2.286 smd: 2(0,6.4)
  rect 7.112x3.81 smd: 2(0,3.505)
  rect 7.214x6.604 smd far side: 2(0,2.946)
  silkscreen extent -3.3,1.45 3.3,5
"Tantale 10µF/6V3" [mm] "1206 ou 3216-18 (175-4041)"
  rect 1.4x1.8 smd: 1(0,0) 2(3.7,0)
  silkscreen extent 0.3,-0.79 3.5,0.81
"Tantale 10µF/16V" [mm] "1206 ou 3216-18 (145-7461)"
  rect 1.4x1.6 smd: 1(0,0) 2(-3.6,0)
  silkscreen extent -3.4,-0.81 -0.2,0.8
"tantale 47µF/10V" [mm] "1210 ou 3528-21 (175-4168)"
  rect 1.6x2.4 smd: 1(0,0) 2(4.2,0)
  silkscreen extent 0.36,-1.45 3.86,1.45
TSSOP_8 [mm]
  rect 1.4x0.42 smd: 1(0,0) 2(0,-0.65) 3(0,-1.3) 4(0,-1.95) 5(5.9,-1.95) 6(5.9,-1.3) 7(5.9,-0.65) 8(5.9,0)
  silkscreen extent 0.7,-2.51 5.2,0.58
"USB Micro 714-2347" [mm] "empreinte pour micro USB RS 714-2347"
  rect 0.45x1.6 smd: 1(-1.3,0) 2(-0.65,0) 3(0,0) 4(0.65,0) 5(1.3,0)
  rect 1.3x2 hole 0.8 slot 1.2 at 90 deg: 6(-2.425,-0.2) 7(2.425,-0.2)
  rect 1.4x2 hole 1 slot 1.5 at 90 deg: 8(-2.725,-3.23) 9(2.725,-3.23)
  rect 1.6x3.4 smd: 10(-0.9,-3.3) 11(0.9,-3.3)
  silkscreen extent -4.1,-6.12 4.1,0
"µSwitch KMR4" [mm] "µSwitch KMR 4"
  rect 1.2x1.2 smd: 1(-2.3,1) 2(2.3,1) 3(-2.3,-1) 4(2.3,-1)
  silkscreen extent -2.4,-1.4 2.4,1.4

## Part data
C1 C1 C1 C1 C1 C1: library part "tantale 220µF/16V", "253-5290 case 7343-31"
C1 C1 C1 C1 C1 C1 C1 C1 C1 C1 C1 C1 C1 C1 C15 C15 C15 C15 C15 C15: library part "tantale 1µF/16V", "145-7406 case 3216-18"
C2 C2 C2 C2 C2 C2 C2 C2 C2 C2 C2 C2 C4 C4 C4 C4 C4 C4 C6 C6 C6 C6 C6 C6 C8 C8 C8 C8 C8 C8_1 C9 C9 C9 C9 C9 C9 C10 C10 C10 C10 C10 C10 C11 C11 C11 C11 C11 C11 C12 C12 C12 C12 C12 C12 C13 C13 C13 C14 C14 C14: library part Cap_CMS_0805, "CMS 0805"
C3 C3 C3: library part "tantale 10µF/16V", "145-7461 case 3216-18"
C3 C3 C3: "électrochimique diam. 6,3mm 128-1810"
C5 C5 C5 C5 C5 C5 C7 C7 C7: library part "tantale 10µF/6V3", "175-4041 ou 145-7412 case 3216-18"
C7 C7 C7_1: library part "tantale 47µF/10V", "175-4168"
CN1 CN1 CN1 CN1 CN1 CN1: "Amphenol 714-2347"
CN1 CN1 CN1 CN1 CN1 CN1 CN1 CN1 CN1 CN1 CN1 CN1 CN1 CN1 CN3 CN3 CN3 CN3 CN3 CN3 CN5 CN5 CN5: library part Inch_1x5_droit, "Inch_1x5_droit"
CN4 CN4 CN4 CN4 CN4 CN4: library part Inch_1x4_droit, "Inch_1x4_droit"
Cx1 Cx1 Cx1 Cx1 Cx1 Cx1 Cx1 Cx1 Cx2 Cx2 Cx2 Cx2 Cx2 Cx2 Cx2 Cx2 Cx3 Cx3 Cx3 Cx3 Cx3 Cx3 Cx3 Cx3: library part "Pont 0603", "Pont pour configuration I2C"
Cx1 Cx1 Cx1 Cx1 Cx1 Cx1 Cx2 Cx2 Cx2 Cx2 Cx2 Cx2 Cx3 Cx3 Cx3 Cx3 Cx3 Cx3: library part Pont, "Pont pour configuration I2C"
L1 L1 L1 L1 L1 L1: library part "Self CD74R", "SMT CD74R Aliexpress"
Led1 Led1 Led1 Led1 Led1 Led1: library part "LTW5AM LED", "LED Golden Dragon Plus"
M1 M1 M1 M1 M1 M1: "MOSFET canal N"
Micro1 Micro1 Micro1 Micro1 Micro1_1 Micro1_1_1: library part Microphone_03, "Microphone électret"
PIR1 PIR1 PIR1 PIR1 PIR1 PIR1: library part PIR_01, "Détecteur infrarouge"
PT1 PT1 PT1 PT1 PT1 PT1 PT2 PT2 PT2 PT2 PT2 PT2 PT3 PT3 PT3 PT3 PT3 PT3 PT4 PT4 PT4 PT4 PT4 PT4 PT5 PT5 PT5 PT5 PT5 PT5 PT6 PT6 PT6 PT6 PT6 PT6: library part "PTEST boucle", "pointe de test CI 262-2179"
R1 R1 R1 R1 R1 R1 R1 R1 R1 R1 R1 R1 R1 R1 R1 R1 R1 R1 R1 R1_3 R2 R2 R2 R2 R2 R2 R2 R2 R2 R2 R2 R2 R2 R2 R3 R3 R3 R3 R3 R3 R3 R3 R3 R3 R3 R3 R3 R3 R4 R4 R4 R4 R4 R4 R5 R5 R5 R5 R5 R5 R6 R6 R6 R6 R6 R6_1 R7 R7 R7 R7 R7 R7 R8 R8 R8 R8 R8 R8 R9 R9 R9 R9 R9 R9 R11 R11 R11 R11 R11 R11 R14 R14 R14 R14 R14 R14 R15 R15 R15 R16 R16 R16 R16 R16 R16 R17 R17 R17 R17 R17 R17 R18 R18 R18 R18 R18 R18 R19 R19 R19 R19 R19 R19 R20 R20 R20: library part "Res CMS 0805", "CMS 0805"
R10 R10 R10 R10 R10 R10: library part "Res CMS 1210 ERJ14B", "CMS 1210"
Reg1 Reg1 Reg1 Reg1 Reg1 Reg1: library part LM1117MPX-3.3, "Régulateur SOT-223"
SW1 SW1 SW1 SW1 SW1 SW1: library part µSwitch, "KMR 4 Series 793-1605"
U1 U1 U1 U1 U1 U1: "AOP"
U3 U3 U3 U3 U3 U3: "DAC I2C (RS : 879-3261)"
U4 U4 U4 U4 U4 U4 U4 U4 U4 U4 U4 U4 U4 U4: "Digital temperature Sensor"
Wi-Fi1 Wi-Fi1 Wi-Fi1 Wi-Fi1 Wi-Fi1 Wi-Fi1_3: "ESP-12E module Wi-Fi"

## Free pads (board coordinates)
  round 158 hole 122: 1(285,135) 1(285,2498) 1(3096,-5074) 1(3096,-3574) 1(3802,2282) 1(6694,-4144) 2(1823,1464) 2(1823,3827) 2(2473,3820) 2(4809,-3934) 2(4809,-2434) 2(5554,-2431) 3(2484,290) 3(2484,1305) 3(3164,290) 3(3164,1305) 3(3838,290) 3(3838,1305)

## Via types
v1: diameter 40, hole 18, Top Layer to Bottom Layer, 167 vias
v2: diameter 50, hole 24, Top Layer to Bottom Layer, 107 vias
v3: diameter 39.37, hole 15.75, Top Layer to Bottom Layer, 48 vias
v4: diameter 60, hole 32, Top Layer to Bottom Layer, 18 vias

## Nets (pads, with @x,y where several pads share a name; then routed paths per layer and width w, separated by ;. In a path a pad name is that pad's centre, name@x,y a point inside that pad or via, vN(x,y) a via of type N, cw(c..) or ccw(c..) an arc to the next point about the centre after c; other vN are vias at no path point)
pads on no net: C1.1 C1.2 C2.1 C2.2 C3.1 C3.2 C4.1 C4.2 C5.1 C5.2 C6.1 C6.2 C7.1 C7.2 C7_1.1 C7_1.2 C8.1 C8.2 C8_1.1 C8_1.2 C9.1 C9.2 C10.1 C10.2 C11.1 C11.2 C12.1 C12.2 C13.1 C13.2 C14.1 C14.2 C15.1 C15.2 CN1.1 CN1.2 CN1.3 CN1.4 CN1.5 CN1.6 CN1.7 CN1.8 CN1.9 CN1.10 CN1.11 CN3.1 CN3.2 CN3.3 CN3.4 CN3.5 CN4.1 CN4.2 CN4.3 CN4.4 CN5.1 CN5.2 CN5.3 CN5.4 CN5.5 Cx1.1 Cx1.2 Cx2.1 Cx2.2 Cx3.1 Cx3.2 L1.1 L1.2 Led1.1 Led1.2 M1.1 M1.2 M1.3 Micro1.0 Micro1.1 Micro1_1.0 Micro1_1.1 Micro1_1_1.0 Micro1_1_1.1 PIR1.1 PIR1.2 PIR1.3 PT1.1 PT2.1 PT3.1 PT4.1 PT5.1 PT6.1 R1.1 R1.2 R1_3.1 R1_3.2 R2.1 R2.2 R3.1 R3.2 R4.1 R4.2 R5.1 R5.2 R6.1 R6.2 R6_1.1 R6_1.2 R7.1 R7.2 R8.1 R8.2 R9.1 R9.2 R10.1 R10.2 R11.1 R11.2 R14.1 R14.2 R15.1 R15.2 R16.1 R16.2 R17.1 R17.2 R18.1 R18.2 R19.1 R19.2 R20.1 R20.2 Reg1.1 Reg1.2 Reg1.3 SW1.1 SW1.2 SW1.3 SW1.4 U1.1 U1.2 U1.3 U1.4 U1.5 U1.6 U1.7 U1.8 U3.1 U3.2 U3.3 U3.4 U3.5 U3.6 U3.7 U3.8 U4.1 U4.2 U4.3 U4.4 U4.5 U4.6 U4.7 U4.8 Wi-Fi1.1 Wi-Fi1.2 Wi-Fi1.3 Wi-Fi1.4 Wi-Fi1.5 Wi-Fi1.6 Wi-Fi1.7 Wi-Fi1.8 Wi-Fi1.9 Wi-Fi1.10 Wi-Fi1.11 Wi-Fi1.12 Wi-Fi1.13 Wi-Fi1.14 Wi-Fi1.15 Wi-Fi1.16 Wi-Fi1.17 Wi-Fi1.18 Wi-Fi1.19 Wi-Fi1.20 Wi-Fi1.21 Wi-Fi1.22 Wi-Fi1_3.1 Wi-Fi1_3.2 Wi-Fi1_3.3 Wi-Fi1_3.4 Wi-Fi1_3.5 Wi-Fi1_3.6 Wi-Fi1_3.7 Wi-Fi1_3.8 Wi-Fi1_3.9 Wi-Fi1_3.10 Wi-Fi1_3.11 Wi-Fi1_3.12 Wi-Fi1_3.13 Wi-Fi1_3.14 Wi-Fi1_3.15 Wi-Fi1_3.16 Wi-Fi1_3.17 Wi-Fi1_3.18 Wi-Fi1_3.19 Wi-Fi1_3.20 Wi-Fi1_3.21 Wi-Fi1_3.22